# Altium PCB GATEWAY_PCB.PcbDoc (part 2 of 2)
Units mm, origin at the board's own origin, x right, y up, seen from the top; angles counter-clockwise.
Board outline 96.14 x 95.25 mm, 2 copper layers (Top Layer, Bottom Layer); 203 components, 123 nets, 653 pads, 432 vias.
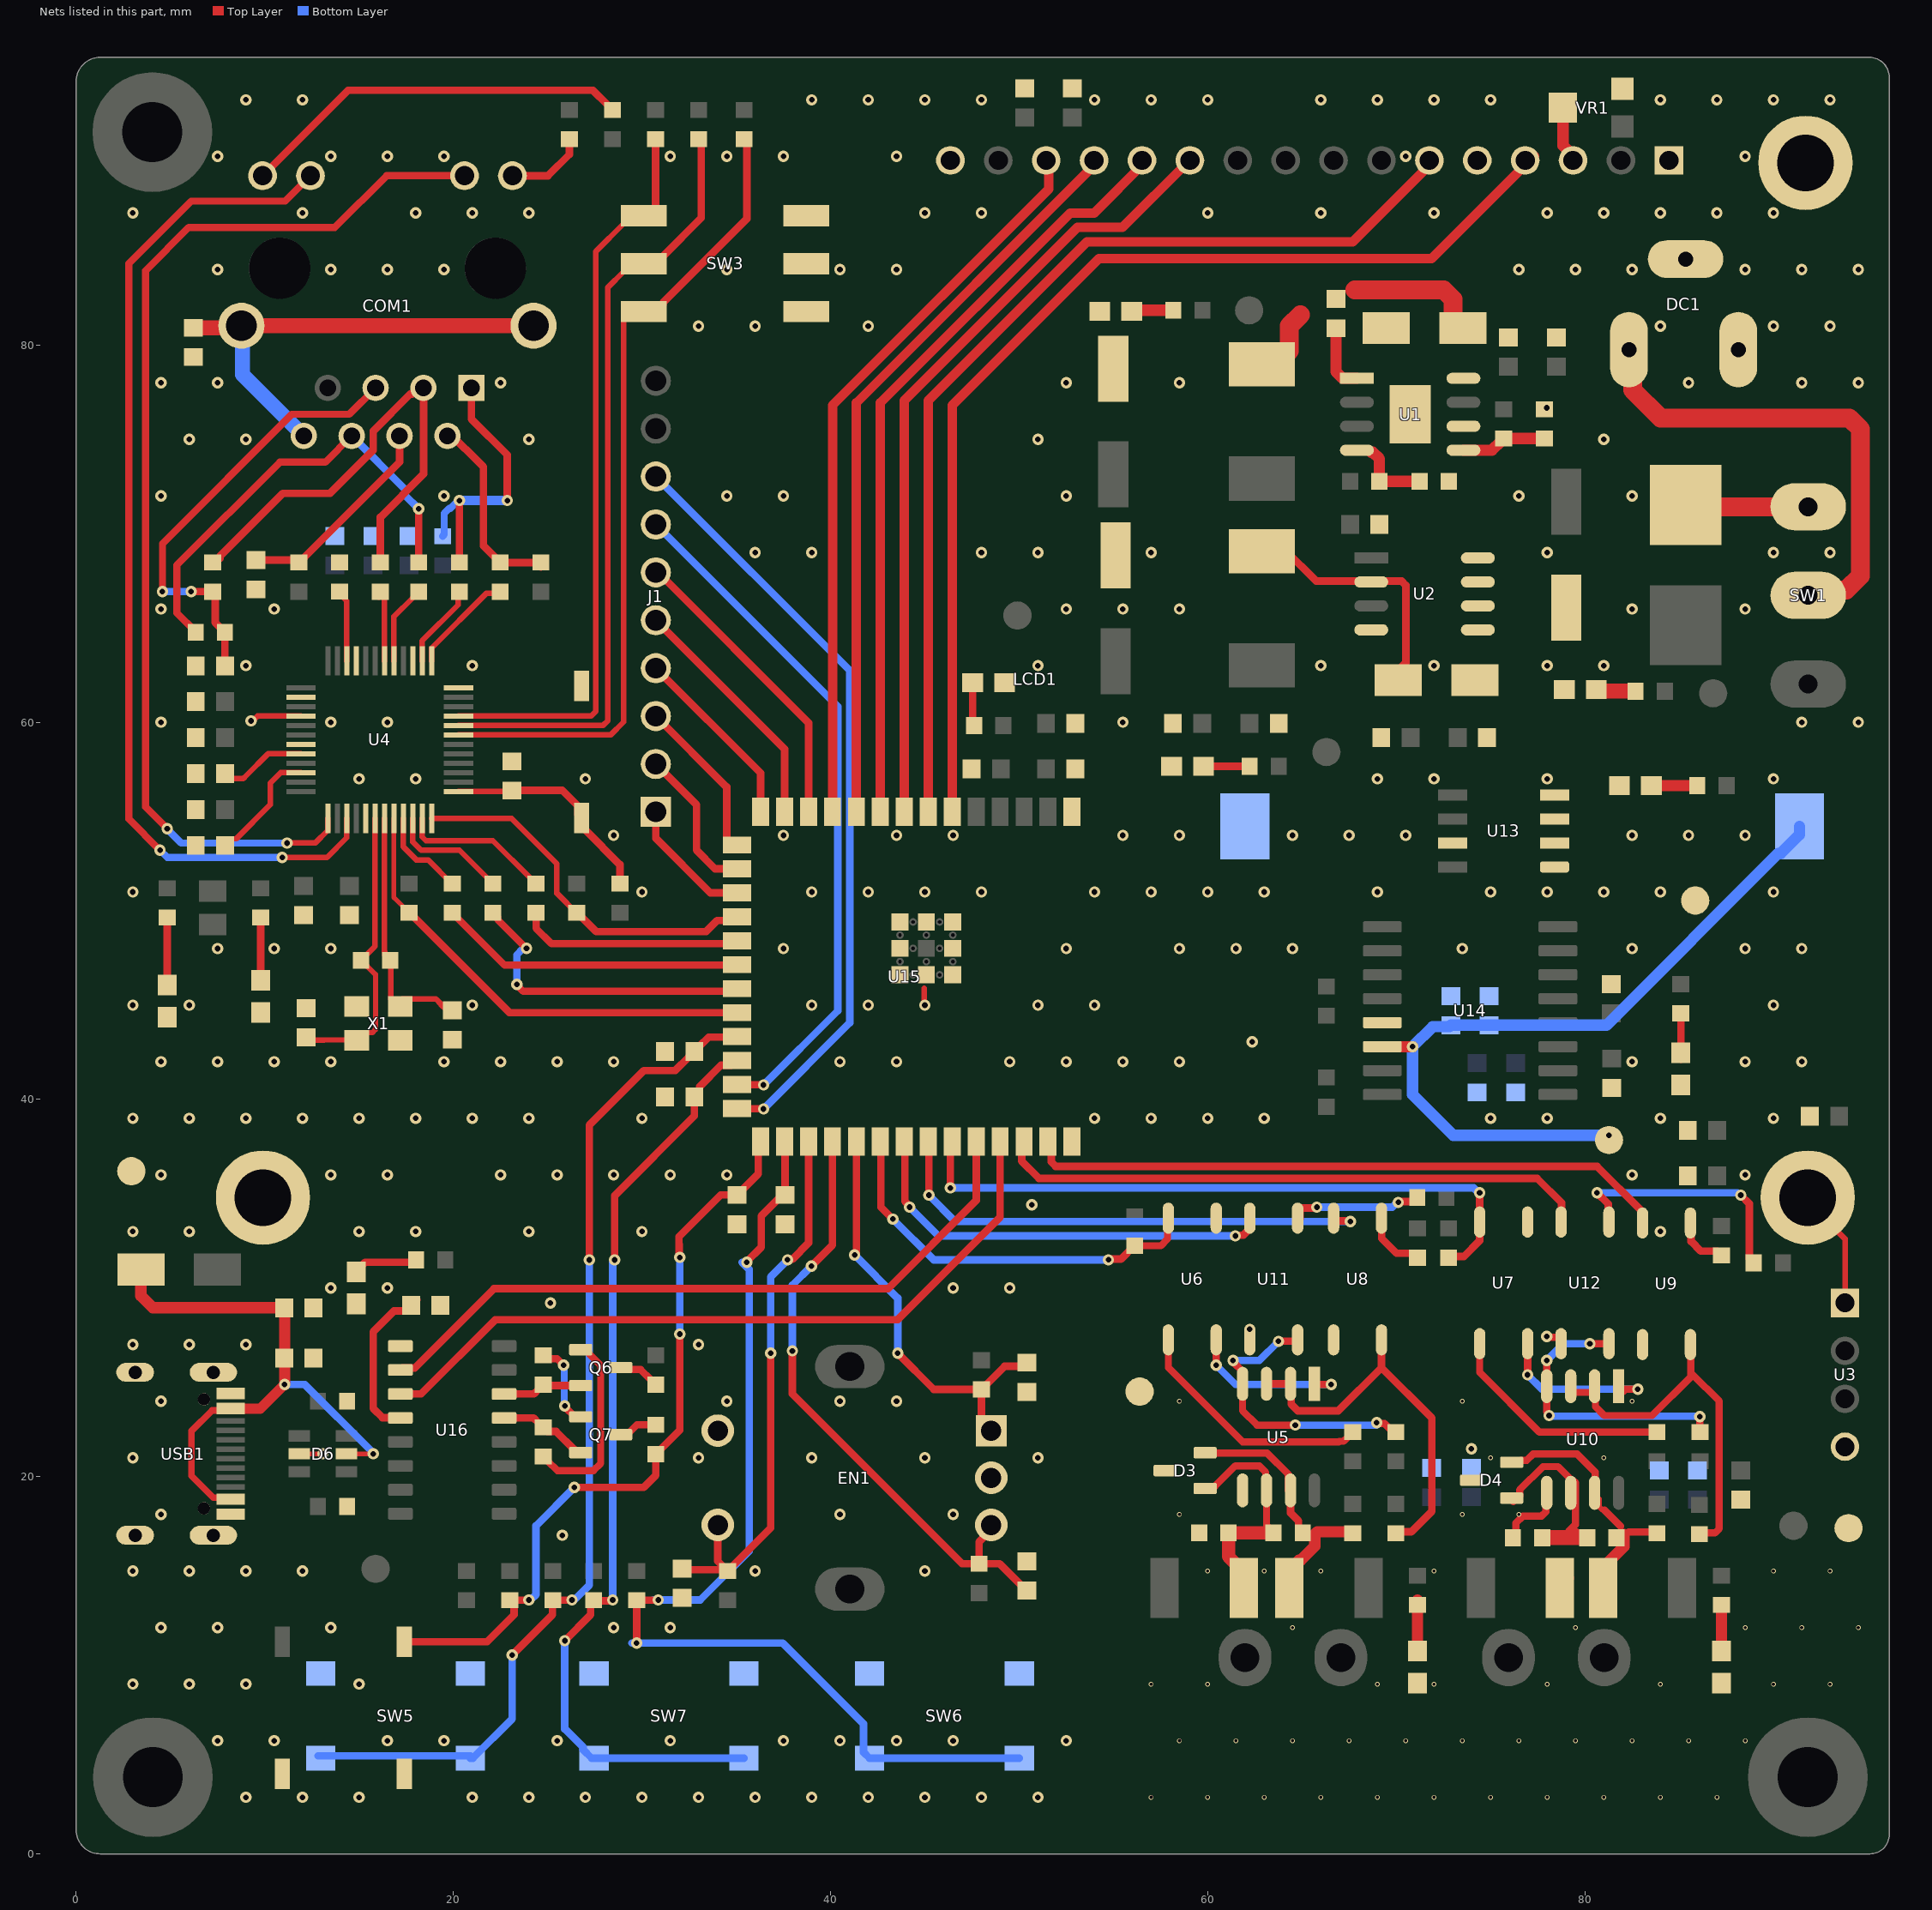
[diagram p2: the nets of this part, all layers, seen from the top]

## Via types
v1: diameter 0.6/0.6 (per signal layer), hole 0.3, Top Layer to Bottom Layer, 276 vias
v2: diameter 0.6, hole 0.3, Top Layer to Bottom Layer, tented both sides, 94 vias
v3: diameter 0.254/0.254 (per signal layer), hole 0.17, Top Layer to Bottom Layer, 49 vias
v4: diameter 0.6, hole 0.3, Top Layer to Bottom Layer, 13 vias

## Nets (pads, with @x,y where several pads share a name; then routed paths per layer and width w, separated by ;. In a path a pad name is that pad's centre, name@x,y a point inside that pad or via, vN(x,y) a via of type N, cw(c..) or ccw(c..) an arc to the next point about the centre after c; other vN are vias at no path point) (continued)
DEBUG_FLASH: C58.2 R80.1 R81.2 SW9.2 U15.27 | length 39.6
  Top Layer w0.4: SW9.2@17.399,11.245 21.786,11.245 23.217,12.676 R81.2@23.217,13.298 ; R81.2@22.993,13.456 R81.2@23.247,13.456 ; R81.2@23.09,13.298 R81.2@23.247,13.456 ; v2(24.003,13.462) 23.997,13.456 R81.2@23.247,13.456 ; v2(26.416,19.431) 30.096,19.431 30.731,20.066 R80.1@30.731,21.193 ; R80.1@30.734,21.196 30.759,21.196 30.984,21.421 30.984,21.446 32.004,22.466 v2(32.004,27.559) ; v2(32.004,31.623) 31.966,31.661 31.966,32.318 31.961,32.323 31.961,32.723 34.176,34.938 C58.2@35.052,34.938 36.171,36.057 U15.27@36.171,37.056
  Bottom Layer w0.4: v2@24.098,13.462 24.384,13.748 24.384,17.399 v2(26.416,19.431) ; v2(32.004,27.559) v2(32.004,31.623)
DEBUG_RXD0: U15.37 U16.3 | length 39.7
  Top Layer w0.4: U16.3@17.189,24.384 18.288,24.384 22.225,28.321 43.561,28.321 48.992,33.752 U15.37@48.992,37.759
DEBUG_TXD0: U15.36 U16.2 | length 37.4
  Top Layer w0.4: U16.2@17.189,25.654 17.299,25.764 17.949,25.764 22.157,29.972 43.053,29.972 47.722,34.641 U15.36@47.722,37.759
DI1: R46.1 U5.4 U11.4 | length 15.3
  Top Layer w0.381: v2(61.341,26.162) 61.383,26.12 61.383,26.048 61.849,25.582 U5.4@61.849,24.923 61.849,23.495 62.611,22.733 v4(64.643,22.733) ; v2(63.754,27.178) 64.693,27.178 U11.4@64.77,27.255 ; v4(68.961,22.86) 69.003,22.818 69.372,22.818 69.825,22.365 R46.1@69.85,22.365
  Bottom Layer w0.381: v2@61.348,26.169 62.745,26.169 v2(63.754,27.178) ; v4(64.643,22.733) 64.664,22.733 64.674,22.743 64.684,22.733 v4@68.961,22.733
DI2: R48.1 U10.4 U12.4 | length 15.6
  Top Layer w0.381: v4(77.978,26.162) U10.4@77.978,24.796 77.978,23.427 78.105,23.3 v4(78.105,23.241) ; v4(80.264,27.051) U12.4@81.28,27.051 ; R48.1@86.106,22.365 R48.1@86.106,22.44
  Top Layer w0.4: v4(86.094,23.181) 86.1,23.176 86.1,22.371 R48.1@86.106,22.365
  Bottom Layer w0.381: v4(77.978,26.162) 78.867,27.051 v4(80.264,27.051) ; v4(78.105,23.241) 78.135,23.211 86.065,23.211 v4(86.094,23.181)
DTR: Q7.2 R76.1 U16.13 | length 4.5
  Top Layer w0.4: U16.13@22.689,23.114 24.253,23.114 24.515,22.852 24.515,22.844 R76.1@24.711,22.648 ; R76.1@24.765,22.619 24.99,22.394 25.446,22.394 26.438,21.402 Q7.2@26.499,21.402
EN1: R41.1 U5.2 U5.3 U8.4 | length 20.8
  Top Layer w0.4: U5.3@63.119,24.923 U5.2@64.389,24.923 64.427,24.885 64.427,23.838 64.77,23.495 66.929,23.495 69.215,25.781 ; U8.4@69.215,27.255 69.215,25.781 ; R41.1@69.977,17.005 70.044,17.072 70.793,17.072 71.882,18.161 71.882,23.114 69.215,25.781
EN1_RS485: U8.2 U15.34 | length 26.7
  Top Layer w0.4: v2(45.212,34.925) U15.34@45.212,37.759 ; U8.2@66.684,33.622 66.74,33.566 67.526,33.566 v2(67.564,33.528)
  Bottom Layer w0.4: v2(45.212,34.925) 46.609,33.528 v2(67.564,33.528)
EN2: R43.1 U9.4 U10.2 U10.3 | length 19.5
  Top Layer w0.381: U10.3@79.502,24.465 80.518,24.465 80.56,24.423 80.56,23.707 81.026,23.241 83.566,23.241 85.618,25.293 85.618,25.507 ; U9.4@85.618,26.981 85.618,25.507 ; R43.1@86.16,17.018 86.899,17.018 87.122,17.241 87.122,24.003 85.725,25.4 85.618,25.507
EN2_RS485: U9.2 U15.39 | length 34.2
  Top Layer w0.4: U15.39@51.532,37.759 51.705,37.586 51.705,36.683 51.939,36.449 80.645,36.449 82.958,34.136 82.958,34.13 83.058,34.03 U9.2@83.058,33.451
ENC_CLK: C47.2 EN1.A R69.1 U15.31 | length 22.9
  Top Layer w0.4: v2(41.275,31.75) 41.275,31.804 41.372,31.901 U15.31@41.372,37.759 ; v2(43.561,26.543) 45.479,24.625 R69.1@48.006,24.625 ; EN1.A@48.521,22.439 48.006,22.954 R69.1@48.006,24.625 ; C47.2@50.419,26.048 50.218,25.847 49.228,25.847 48.256,24.875 48.256,24.85 48.031,24.625 R69.1@48.006,24.625
  Bottom Layer w0.4: v2(41.275,31.75) 43.561,29.464 v2(43.561,26.543)
ENC_DATA: C48.2 EN1.B R70.1 U15.30 | length 33.3
  Top Layer w0.4: v2(37.973,26.67) 37.973,24.384 46.977,15.38 R70.1@47.879,15.38 ; v2(38.984,31.164) 40.102,32.282 U15.30@40.102,37.759 ; EN1.B@48.521,17.439 48.521,17.183 47.879,16.541 R70.1@47.879,15.38 ; C48.2@50.419,13.957 50.394,13.957 48.971,15.38 R70.1@47.879,15.38
  Bottom Layer w0.4: v2(37.973,26.67) 37.973,30.153 v2(38.984,31.164)
ENC_SW: C46.2 EN1.E R68.1 U15.29 | length 29.6
  Top Layer w0.4: C46.2@32.131,15.126 32.194,15.062 34.294,15.062 R68.1@34.37,15.138 ; EN1.E@34.021,17.439 34.021,15.522 34.294,15.249 34.294,15.224 34.355,15.163 34.38,15.163 R68.1@34.544,14.999 34.569,14.999 34.794,15.224 34.794,15.249 36.83,17.285 v2(36.83,26.543) ; v2(37.719,31.496) 37.757,31.534 37.98,31.534 38.832,32.387 U15.29@38.832,37.759
  Bottom Layer w0.4: v2(36.83,26.543) 36.83,30.597 37.719,31.486 v2(37.719,31.496)
GND: C1.2 C2.2 C3.2 C4.2 C6.2 C7.2 C8.2 C10.2 C11.2 C12.2 C13.2 C15.1 C16.1 C17.1 C18.1 C19.1 C20.1 C21.1 C22.1 C23.1 C24.1 C25.1 C26.1 C27.1 C28.1 C29.1 C30.1 C35.1 C36.1 C37.1 C38.1 C39.1 C40.1 C42.1 C43.1 C44.1 C45.1 C46.1 C47.1 C48.1 C49.1 C50.1 C51.1 C52.1 C53.1 C54.1 C55.1 C56.1 C57.1 C58.1 D1.1 D2.1 D6.2 DC1.2 DC1.3 EN1.C EN1.D LCD1.1 LCD1.5 LCD1.16 LED1.2 LED2.2 LED3.2 LED4.2 LED5.2 LED12.2 LED13.2 LED14.2 LED15.2 R6.2 R7.2 R15.1 R82.2 R83.2 SW2.1 SW3.1_1 SW3.2_1 SW3.3_1 SW5.1 SW6.1 SW7.1 SW8.1 SW9.1 TP1.1 TP2.1 U1.6 U1.9 U2.4 U2.5 U2.6 U2.7 U2.8 U3.1 U4.3 U4.9 U4.14 U4.16 U4.19 U4.29 U4.48 U6.3 U7.3 U13.1 U13.2 U13.3 U13.4 U13.7 U14.13 U15.1 U15.40 U15.41_1 U15.41_2 U15.41_3 U15.41_4 U15.41_6 U15.41_7 U15.41_8 U15.41_9 U16.1 USB1.A1 USB1.B1 USB1.SHIELD VBAT1.N VR1.3 X1.2 X1.4 | length 13.4
  Top Layer w0.25: D6.2@11.831,21.209 v2(13.081,21.209)
  Top Layer w0.295: v2(9.271,60.071) 9.354,60.071 9.606,60.323 U4.16@11.916,60.323 ; LCD1.1@10.033,34.671 11.816,34.671 LCD1.1@11.943,34.544 ; 44.961,45.906 44.961,45.039 v1(45,45) ; R6.2@77.978,76.594 v2(77.978,76.669) ; LCD1.1@91.821,34.798 91.821,34.583 93.794,32.61 U3.1@93.794,29.21
  other v1: 9,3 12,3 15,3 21,3 24,3 27,3 30,3 33,3 36,3 39,3 42,3 45,3 48,3 51,3 7.5,6 10.5,6 16.5,6 19.5,6 25.5,6 31.5,6 37.5,6 40.5,6 43.5,6 46.5,6 52.5,6 3,9 6,9 9,9 15,9 4.5,12 7.5,12 13.5,12 28.5,12 31.5,12 3,15 6,15 9,15 12,15 36,15 45,15 4.5,18 40.5,18 46.5,18 3,21 33,21 39,21 45,21 51,21 4.5,24 34.5,24 40.5,24 43.5,24 3,27 6,27 9,27 33,27 13.5,30 16.5,30 46.5,30 49.5,30 3,33 6,33 15,33 18,33 24,33 30,33 84,33 4.5,36 13.5,36 16.5,36 22.5,36 25.5,36 28.5,36 31.5,36 34.5,36 82.5,36 88.5,36 3,39 6,39 9,39 12,39 15,39 18,39 21,39 24,39 30,39 54,39 57,39 60,39 63,39 75,39 78,39 84,39 90,39 4.5,42 7.5,42 10.5,42 13.5,42 19.5,42 22.5,42 25.5,42 28.5,42 40.5,42 43.5,42 49.5,42 52.5,42 55.5,42 58.5,42 82.5,42 88.5,42 91.5,42 3,45 6,45 21,45 39,45 42,45 51,45 54,45 90,45 7.5,48 10.5,48 13.5,48 37.5,48 52.5,48 58.5,48 61.5,48 64.5,48 73.5,48 82.5,48 88.5,48 91.5,48 3,51 30,51 39,51 42,51 45,51 48,51 54,51 57,51 60,51 63,51 69,51 75,51 78,51 81,51 84,51 90,51 28.5,54 37.5,54 43.5,54 46.5,54 55.5,54 58.5,54 64.5,54 67.5,54 70.5,54 82.5,54 85.5,54 88.5,54 15,57 18,57 27,57 69,57 72,57 78,57 90,57 4.5,60 13.5,60 16.5,60 55.5,60 91.5,60 94.5,60 9,63 21,63 51,63 66,63 72,63 78,63 81,63 4.5,66 10.5,66 52.5,66 55.5,66 58.5,66 82.5,66 88.5,66 36,69 39,69 48,69 51,69 57,69 78,69 90,69 93,69 4.5,72 19.5,72 34.5,72 37.5,72 52.5,72 76.5,72 82.5,72 6,75 9,75 24,75 51,75 81,75 4.5,78 7.5,78 22.5,78 52.5,78 58.5,78 85.5,78 91.5,78 94.5,78 33,81 36,81 42,81 84,81 90,81 93,81 7.5,84 13.5,84 16.5,84 19.5,84 34.5,84 40.5,84 43.5,84 76.5,84 79.5,84 82.5,84 88.5,84 91.5,84 94.5,84 3,87 12,87 18,87 21,87 24,87 45,87 48,87 60,87 66,87 72,87 78,87 81,87 84,87 87,87 90,87 7.5,90 13.5,90 16.5,90 19.5,90 31.5,90 34.5,90 37.5,90 43.5,90 70.5,90 88.5,90 9,93 12,93 39,93 42,93 45,93 48,93 54,93 57,93 60,93 66,93 69,93 72,93 75,93 84,93 87,93 90,93 93,93
  other v2: 25.781,16.891 25.146,29.21 50.673,34.417
  other v4: 62.357,43.053
GND_RJ45: C15.2 COM1.8 COM1.15 COM1.16 | length 25.7
  Top Layer w0.8: C15.2@6.604,80.912 8.648,80.912 COM1.16@8.76,81.024 ; COM1.16@8.56,81.073 8.609,81.024 COM1.15@24.255,81.024
  Bottom Layer w0.6: COM1.16@8.76,81.024 COM1.16@8.76,81.078 ; COM1.15@24.132,81.278 COM1.15@24.255,81.155 ; COM1.15@24.255,81.278 COM1.15@24.255,81.155 ; COM1.15@24.257,81.153 COM1.15@24.255,81.155
  Bottom Layer w0.8: COM1.16@8.662,81.175 8.76,81.078 8.809,81.028 8.809,78.44 COM1.8@12.065,75.184
GND_RS485: C14.2 C31.2 C32.2 C33.2 C34.2 D3.3 D4.3 LED10.2 LED11.2 R39.1 R50.1 TP3.1 TP10.1 U3.4 U5.5 U8.3 U9.3 U10.5 U11.3 U12.3 | length 5.5
  Top Layer w0.381: U11.3@62.23,27.255 v4(62.23,27.813) ; R50.1@76.06,16.764 76.077,16.764 76.337,17.024 76.337,17.536 76.708,17.907 77.7,17.907 77.936,18.143 77.936,19.104 U10.5@77.978,19.146 ; v4(77.978,27.432) 78.02,27.39 78.639,27.39 78.74,27.289 U12.3@78.74,27.051 U12.3@78.689,27
  other v2: 73.986,21.475
  other v3: 57,3 60,3 63,3 66,3 69,3 72,3 75,3 78,3 81,3 84,3 87,3 58.5,6 61.5,6 64.5,6 67.5,6 70.5,6 73.5,6 76.5,6 79.5,6 82.5,6 85.5,6 88.5,6 57,9 60,9 69,9 72,9 78,9 84,9 90,9 93,9 64.5,12 79.5,12 88.5,12 91.5,12 94.5,12 60,15 63,15 66,15 72,15 90,15 93,15 58.5,18 73.5,18 76.5,18 75,21 81,21 58.5,24 73.5,24 82.5,24
IO3: J1.3 U15.15 | length 8.8
  Top Layer w0.4: J1.3@30.734,60.325 34.492,56.567 34.492,53.744 34.742,53.494 U15.15@35.042,53.494
IO8: J1.6 U15.12 | length 16.1
  Top Layer w0.4: J1.6@30.734,67.945 30.861,67.945 38.832,59.974 U15.12@38.832,55.259
IO9: J1.1 U15.17 | length 6.9
  Top Layer w0.4: J1.1@30.734,55.245 30.734,53.848 33.628,50.954 U15.17@35.042,50.954
IO19: J1.5 U15.13 | length 13
  Top Layer w0.4: J1.5@30.734,65.405 37.562,58.577 U15.13@37.562,55.259
IO20: J1.4 U15.14 | length 9.9
  Top Layer w0.4: J1.4@30.734,62.865 36.292,57.307 U15.14@36.292,55.259
IO45: J1.8 U15.26 | length 41.1
  Top Layer w0.4: U15.26@35.042,39.524 35.056,39.511 36.435,39.511 v4(36.449,39.497)
  Bottom Layer w0.4: J1.8@30.734,73.025 41.021,62.738 41.021,44.069 36.456,39.504 36.442,39.504 v4(36.449,39.497)
IO46: J1.2 U15.16 | length 8
  Top Layer w0.4: J1.2@30.734,57.785 32.893,55.626 32.893,53.213 33.882,52.224 U15.16@35.042,52.224
IO48: J1.7 U15.25 | length 37
  Top Layer w0.4: U15.25@35.179,40.894 35.142,40.894 U15.25@35.042,40.794 35.056,40.781 36.435,40.781 v4(36.449,40.767)
  Bottom Layer w0.4: J1.7@30.734,70.485 40.386,60.833 40.386,44.704 36.456,40.774 36.442,40.774 v4(36.449,40.767)
LED1: COM1.11 U4.27 | length 54.9
  Top Layer w0.295: v2(10.922,52.832) 13.302,52.832 14.346,53.876 U4.27@14.346,54.893
  Top Layer w0.38: v2(4.445,53.213) 2.794,54.864 2.794,84.328 6.096,87.63 11.081,87.63 COM1.11@12.425,88.974
  Bottom Layer w0.254: COM1.11@12.425,89.228 12.425,89.26 COM1.11@12.446,89.281
  Bottom Layer w0.38: v2(4.445,53.213) 4.826,52.832 v2(10.922,52.832)
LED2: COM1.10 U4.25 | length 58.8
  Top Layer w0.295: v2(11.176,53.594) 12.671,53.594 13.346,54.268 U4.25@13.346,54.893
  Top Layer w0.38: v2(4.826,54.356) 3.683,55.499 3.683,83.947 5.969,86.233 13.716,86.233 16.457,88.974 COM1.10@20.59,88.974 COM1.10@20.595,88.974
  Bottom Layer w0.38: v2(4.826,54.356) 4.826,54.331 5.563,53.594 v2(11.176,53.594)
NetC5_1: C5.1 U1.1 | length 3.6
  Top Layer w0.6: C5.1@66.802,80.902 66.802,78.583 67.153,78.232 U1.1@67.914,78.232
NetC5_2: C5.2 D2.2 L1.1 U1.8 | length 10.6
  Top Layer w1: L1.1@63.271,79.022 63.653,79.022 64.328,79.697 64.328,81.012 64.913,81.598 ; 67.795,82.932 72.501,82.932 73.018,82.415 73.018,81.249 73.368,80.899 D2.2@73.407,80.899
NetC24_2: C24.2 U4.22 | length 6.3
  Top Layer w0.295: C24.2@7.887,53.467 7.887,53.492 8.214,53.82 8.481,53.82 10.287,55.626 10.287,56.769 10.841,57.323 U4.22@11.916,57.323
NetC25_2: C25.2 U4.20 | length 4.5
  Top Layer w0.295: C25.2@7.919,57.023 8.868,57.023 9.017,57.172 10.169,58.323 U4.20@11.916,58.323
NetC26_2: C26.2 COM1.5 R20.1 R21.1 | length 24.2
  Top Layer w0.38: v2(4.572,66.929) 4.572,69.469 11.43,76.327 14.478,76.327 COM1.5@15.875,77.724
  Top Layer w0.4: v2(6.096,66.929) 6.102,66.923 7.233,66.923 R21.1@7.239,66.916 ; R21.1@7.366,66.916 7.366,65.291 7.637,65.02 7.662,65.02 7.887,64.795 C26.2@7.887,62.992
  Bottom Layer w0.381: v2(4.572,66.929) v2@6.223,66.929
NetC27_2: C27.2 COM1.4 R19.2 | length 11.1
  Top Layer w0.4: C27.2@9.525,68.593 11.684,68.593 R19.2@11.811,68.466 ; R19.2@12.094,68.736 17.15,73.792 COM1.4@17.15,75.438
NetC44_2: C44.2 R65.1 SW5.2 U15.23 | length 55.2
  Top Layer w0.4: v2(23.114,10.541) 25.249,12.676 25.249,13.298 R65.1@25.4,13.449 ; R65.1@25.254,13.456 26.283,13.456 v2(26.289,13.462) ; v2(27.205,31.491) 27.205,38.635 30.099,41.529 31.763,41.529 32.479,42.245 32.504,42.245 32.779,42.52 32.779,42.57 33.054,42.845 33.079,42.845 33.541,43.307 U15.23@35.428,43.307
  Bottom Layer w0.4: SW5.2@12.831,5.199 20.906,5.199 SW5.2@20.906,5.072 21.031,5.072 23.114,7.155 v2(23.114,10.541) ; v2@26.416,13.462 27.205,14.251 v2(27.205,31.491)
NetC45_2: C45.2 R66.1 SW6.2 U15.28 | length 55.7
  Top Layer w0.4: v2(29.718,11.176) R66.1@29.718,13.449 29.724,13.456 30.855,13.456 v2(30.861,13.462) ; v2(35.56,31.369) 35.56,31.401 36.322,32.163 36.322,33.82 37.389,34.887 C45.2@37.579,35.077 ; C45.2@37.592,34.938 U15.28@37.592,37.098
  Bottom Layer w0.4: v2@29.464,11.176 37.465,11.176 41.752,6.889 41.752,5.385 SW6.2@42.065,5.072 SW6.2@50.015,5.072 ; v2@30.607,13.462 33.089,13.462 35.687,16.06 35.687,30.988 v2@35.306,31.369
NetC49_2: C49.2 R72.2 SW7.2 U15.24 | length 50.7
  Top Layer w0.4: v2(25.908,11.303) 27.281,12.676 27.281,13.298 R72.2@27.432,13.449 27.445,13.462 R72.2@27.775,13.462 ; R72.2@27.775,13.424 28.41,13.424 v2(28.448,13.462) ; v2(28.548,31.491) 28.548,34.898 32.779,39.129 C49.2@32.779,40.157 ; C49.2@32.779,40.132 33.054,40.407 33.054,40.674 34.194,41.814 34.738,41.814 U15.24@35.215,42.291
  Bottom Layer w0.4: v2(25.908,11.303) 25.908,6.624 26.885,5.647 26.885,5.522 27.335,5.072 SW7.2@27.46,5.072 SW7.2@35.41,5.072 ; v2(28.448,13.462) 28.448,31.337 28.548,31.437 v2(28.548,31.491)
NetC57_2: C57.2 U16.4 | length 8.9
  Top Layer w0.4: U16.4@17.189,23.114 17.171,23.132 16.238,23.132 15.748,23.622 15.748,27.686 16.845,28.783 17.746,28.783 18.021,29.058 C57.2@18.021,29.083 ; C57.2@17.865,29.206 18.042,29.383 C57.2@18.067,29.383
NetCOM1_1: COM1.1 R17.1 R24.2 | length 14.9
  Top Layer w0.38: R24.2@20.32,68.466 v2(20.32,71.755)
  Top Layer w0.4: COM1.1@20.96,77.724 20.96,76.068 22.86,74.168 v2(22.86,71.755)
  Bottom Layer w0.38: R17.1@19.431,69.863 19.514,69.946 19.514,71.076 19.783,71.345 19.85,71.345 20.26,71.755 v2(20.32,71.755)
  Bottom Layer w0.5: v2(20.32,71.755) v2(22.86,71.755)
NetCOM1_2: COM1.2 R16.1 R23.2 | length 10.2
  Top Layer w0.4: COM1.2@19.69,75.438 21.59,73.538 21.59,69.355 R23.2@22.479,68.466 R16.1@24.384,68.466 ; R16.1@24.638,68.225 R16.1@24.759,68.345
NetCOM1_3: COM1.3 R21.2 R22.2 | length 25.5
  Top Layer w0.4: R21.2@7.366,68.541 7.466,68.541 7.616,68.691 7.616,68.791 10.961,72.136 13.462,72.136 15.748,74.422 15.748,75.438 17.706,77.396 17.817,77.396 17.954,77.533 18.415,77.533 18.415,73.152 16.129,70.866 R22.2@16.129,68.359
NetCOM1_6: COM1.6 R18.2 R20.2 | length 24.2
  Top Layer w0.38: R20.2@6.337,64.77 6.337,64.795 5.334,65.798 5.334,68.326 10.795,73.787 13.208,73.787 COM1.6@14.605,75.184
  Top Layer w0.4: v2(18.158,71.312) 18.158,68.605 R18.2@18.209,68.555
  Bottom Layer w0.4: COM1.6@14.605,75.184 17.447,72.342 17.447,72.023 v2(18.158,71.312)
NetCOM1_9: COM1.9 R25.2 | length 4.3
  Top Layer w0.4: COM1.9@23.13,88.974 25.015,88.974 26.15,90.109 R25.2@26.15,90.907
NetCOM1_12: COM1.12 R32.2 | length 21.4
  Top Layer w0.4: COM1.12@9.88,88.974 9.705,88.974 9.652,89.027 9.938,89.027 14.421,93.51 27.396,93.51 28.186,92.719 28.186,92.682 28.411,92.457 R32.2@28.448,92.457
NetD1_2: D1.2 L2.1 U2.2 | length 12.4
  Top Layer w0.4: L2.1@63.525,69.139 64.1,69.139 65.751,67.488 67.884,67.488 67.896,67.475 68.663,67.475 68.676,67.488 68.689,67.475 69.456,67.475 69.468,67.488 70.276,67.488 70.51,67.253 70.51,63.17 D1.2@70.129,62.789
NetD3_1: D3.1 F2.1 R38.1 R39.2 U5.6 | length 12.8
  Top Layer w0.381: D3.1@59.861,19.37 59.97,19.479 60.373,19.479 61.468,20.574 62.738,20.574 63.077,20.235 U5.6@63.077,19.332 ; U5.6@63.119,19.273 63.119,17.411 63.487,17.043 R38.1@63.487,17.018
  Top Layer w0.7: F2.1@61.917,14.097 61.917,14.947 61.1,15.764 R39.2@61.1,17.018 61.175,17.018 61.227,17.018 R38.1@63.487,17.018
NetD3_2: D3.2 F1.1 R33.1 R38.2 U5.7 | length 13.8
  Top Layer w0.258: R38.2@65.058,17.018 65.121,16.955 65.683,16.955
  Top Layer w0.381: D3.2@59.882,21.249 63.15,21.249 64.271,20.128 U5.7@64.271,19.273
  Top Layer w0.4: U5.7@64.389,19.273 64.389,18.084 64.812,17.661 64.812,17.243 R38.2@65.037,17.018
  Top Layer w0.6: F1.1@64.389,14.268 64.389,15.118 64.839,15.568 64.936,15.568 65.683,16.315 65.683,16.955 65.808,17.08 ; 65.942,17.074 67.44,17.074 R33.1@67.446,17.067
NetD4_1: D4.1 F4.1 R49.1 R50.2 U10.6 | length 11.2
  Top Layer w0.381: D4.1@76.2,18.673 76.2,18.958 76.528,18.958 76.542,18.971 76.542,19.3 77.778,20.536 78.578,20.536 79.326,19.788 79.401,19.788 79.502,19.687 79.502,19.146 79.502,17.461 79.134,17.093 79.134,17.068 79.579,17.068 R49.1@79.756,16.891
  Top Layer w0.7: F4.1@78.681,14.224 F4.1@79.081,14.624
  Top Layer w0.8: R50.2@77.737,16.764 79.579,16.764 R49.1@80.124,16.764
NetD4_2: D4.2 F3.1 R44.1 R49.2 U10.7 | length 13.3
  Top Layer w0.258: U10.7@80.772,18.815 80.772,18.385 80.93,18.227 81.036,18.227 ; 81.887,17.376 81.887,17.085 81.891,17.081 82.182,17.081 82.182,16.764
  Top Layer w0.381: D4.2@76.498,20.762 76.607,20.872 76.923,20.872 77.257,21.206 79.586,21.206 80.547,20.245 U10.7@80.547,19.04 ; 82.322,17.068 R44.1@83.807,17.068
  Top Layer w0.4: 81.036,18.227 81.887,17.376
  Top Layer w0.6: F3.1@80.899,14.274 80.899,15.124 81.349,15.574 82.07,16.295 R49.2@82.07,16.943
NetFuse1_1: Fuse1.1 SW1.1 | length 6.4
  Top Layer w1: Fuse1.1@85.496,71.564 85.636,71.425 SW1.1@91.846,71.425
NetLCD1_4: LCD1.4 U15.6 | length 58.3
  Top Layer w0.5: U15.6@46.331,55.259 46.331,55.138 U15.6@46.452,55.259 46.452,76.805 54.229,84.582 71.882,84.582 76.835,89.535 LCD1.4@76.835,89.789 ; LCD1.4@76.962,89.662 LCD1.4@77.326,90.026
NetLCD1_6: LCD1.6 U15.7 | length 54.1
  Top Layer w0.5: U15.7@45.061,55.259 45.061,55.388 U15.7@45.182,55.509 ; U15.7@45.182,55.259 U15.7@45.182,55.509 ; LCD1.6@71.755,89.789 71.755,89.535 67.691,85.471 53.594,85.471 45.182,77.059 U15.7@45.182,55.509
NetLCD1_11: LCD1.11 U15.8 | length 42.3
  Top Layer w0.5: U15.8@43.912,55.259 43.912,77.059 53.086,86.233 55.477,86.233 58.906,89.662 LCD1.11@59.182,89.662
NetLCD1_12: LCD1.12 U15.9 | length 41.2
  Top Layer w0.5: U15.9@42.521,55.259 42.521,55.138 U15.9@42.642,55.259 42.642,76.932 52.705,86.995 53.975,86.995 LCD1.12@56.642,89.662
NetLCD1_13: LCD1.13 U15.10 | length 39.8
  Top Layer w0.5: U15.10@41.372,55.259 41.372,76.932 53.975,89.535 LCD1.13@53.975,89.789
NetLCD1_14: LCD1.14 U15.11 | length 39.4
  Top Layer w0.5: U15.11@39.981,55.259 39.981,55.138 U15.11@40.102,55.259 40.102,76.805 51.562,88.265 LCD1.14@51.562,89.662
NetLED1_1: LED1.1 R1.2 | length 2
  Top Layer w0.8: LED1.1@80.666,61.646 R1.2@82.689,61.646
NetLED2_1: LED2.1 R2.2 | length 1.8
  Top Layer w0.6: LED2.1@56.249,81.837 56.251,81.839 R2.2@58.051,81.839
NetLED3_1: LED3.1 R3.2 | length 2.3
  Top Layer w0.4: LED3.1@59.908,57.66 61.992,57.66 62.09,57.758 R3.2@62.09,57.785
NetLED4_1: LED4.1 R8.2 | length 3.6
  Top Layer w0.4: R8.2@4.826,49.644 4.826,46.065 LED4.1@4.827,46.064
NetLED5_1: LED5.1 R9.2 | length 3.3
  Top Layer w0.4: R9.2@9.779,49.644 9.779,46.319 LED5.1@9.78,46.318
NetLED10_1: LED10.1 R55.2 | length 2.4
  Top Layer w0.6: LED10.1@87.25,10.758 R55.2@87.25,13.195
NetLED11_1: LED11.1 R56.2 | length 2.4
  Top Layer w0.6: LED11.1@71.12,11.013 R56.2@71.12,13.449
NetLED12_1: LED12.1 R61.2 | length 2.3
  Top Layer w0.4: LED12.1@85.091,42.127 LED12.1@85.093,42.471 R61.2@85.091,44.451
NetLED13_1: LED13.1 R62.2 | length 1.9
  Top Layer w0.6: LED13.1@84.038,56.641 R62.2@85.966,56.642
NetLED14_1: LED14.1 R77.2 | length 2.3
  Top Layer w0.38: LED14.1@47.535,62.104 47.535,59.894 R77.2@47.612,59.817
NetLED15_1: LED15.1 R78.2 | length 3.4
  Top Layer w0.4: LED15.1@14.859,30.861 14.859,30.911 15.317,31.369 R78.2@18.021,31.369
NetQ6_1: Q6.1 R76.2 | length 10.2
  Top Layer w0.38: R76.2@24.765,21.069 24.79,21.069 25.025,20.834 25.025,20.809 25.514,20.32 27.432,20.32 27.813,20.701 27.813,25.908 27.178,26.543 27.178,26.621 27.068,26.731 Q6.1@26.753,26.731
NetQ6_3: Q6.3 R75.2 | length 2.2
  Top Layer w0.38: Q6.3@28.873,25.781 28.973,25.681 29.932,25.681 30.474,25.139 30.474,25.114 30.709,24.879 R75.2@30.734,24.879
NetQ7_1: Q7.1 R79.2 | length 4.5
  Top Layer w0.381: R79.2@24.892,26.429 24.892,26.382 25.025,26.25 25.507,26.25 v2(25.849,25.908) ; v2(25.908,23.749) 25.908,23.705 26.438,23.175 Q7.1@26.753,23.175
  Bottom Layer w0.381: v2(25.849,25.908) 25.878,25.878 25.878,23.779 v2(25.908,23.749)
NetQ7_3: Q7.3 R80.2 | length 2.2
  Top Layer w0.38: Q7.3@28.619,22.352 Q7.3@28.729,22.242 ; Q7.3@28.873,22.225 28.983,22.335 29.32,22.335 29.731,22.746 R80.2@30.734,22.746
NetR4_2: R4.2 R6.1 U1.5 | length 4.6
  Top Layer w0.6: U1.5@73.564,74.422 75.07,74.422 75.542,74.894 75.542,74.919 75.667,75.044 R4.2@75.692,75.044 R6.1@77.851,75.044
NetR5_2: R5.2 R7.1 U1.4 | length 4
  Top Layer w0.6: U1.4@68.676,74.32 68.75,74.32 69.101,73.969 R5.2@69.101,72.824 ; R5.2@69.101,72.771 R7.1@71.361,72.771
NetR10_1: R10.1 U4.32 U15.22 | length 25
  Top Layer w0.254: U4.32@16.846,54.893 16.846,50.705 17.33,50.221 17.33,50.196 17.628,49.898 R10.1@17.653,49.898 R10.1@17.653,49.823
  Top Layer w0.4: R10.1@17.653,49.823 17.753,49.823 22.972,44.604 U15.22@35.042,44.604
NetR11_1: R11.1 U4.36 U15.18 | length 19.9
  Top Layer w0.295: U4.36@18.846,54.893 23.085,54.893 25.487,52.491 25.487,50.929 26.593,49.823 R11.1@26.643,49.823
  Top Layer w0.4: R11.1@26.643,49.823 27.571,48.895 33.401,48.895 33.992,49.486 34.844,49.486 U15.18@35.042,49.684
NetR12_1: R12.1 U4.35 | length 8.2
  Top Layer w0.295: U4.35@18.346,54.893 18.346,53.917 18.542,53.721 22.098,53.721 24.081,51.738 24.081,51.725 24.454,51.353 R12.1@24.466,51.353
NetR12_2: R12.2 U15.19 | length 11.9
  Top Layer w0.38: R12.2@24.384,49.898 24.384,49.076 25.2,48.26 34.888,48.26 U15.19@35.042,48.414
NetR13_1: R13.1 U4.34 | length 6.7
  Top Layer w0.295: U4.34@17.846,54.893 17.846,53.655 18.288,53.213 20.32,53.213 21.795,51.738 21.795,51.725 22.294,51.227 R13.1@22.306,51.227
NetR13_2: R13.2 U15.21 | length 17.1
  Top Layer w0.38: R13.2@22.098,49.898 22.123,49.898 22.358,49.663 22.358,49.524 v2(23.876,48.006) ; v2(23.368,46.101) 23.368,46.063 23.701,45.731 U15.21@35.426,45.731
  Bottom Layer w0.38: v2(23.368,46.101) 23.368,47.673 23.659,47.964 23.834,47.964 v2(23.876,48.006)
NetR14_1: R14.1 U4.33 | length 4.8
  Top Layer w0.295: 17.346,53.393 U4.33@17.346,54.893 ; 17.398,53.341 18.034,52.705 18.657,52.705 19.914,51.448 R14.1@19.939,51.448
NetR14_2: R14.2 U15.20 | length 16.5
  Top Layer w0.38: R14.2@19.835,50.129 19.86,50.129 20.072,49.917 R14.2@20.072,49.892 ; R14.2@19.945,49.892 22.72,47.117 U15.20@34.974,47.117
NetR15_2: R15.2 U4.10 | length 3.5
  Top Layer w0.295: R15.2@14.097,66.675 14.346,66.426 U4.10@14.346,63.253
NetR35_1: R35.1 U6.1 | length 12.7
  Top Layer w0.381: U6.1@57.912,27.255 57.912,25.781 61.849,21.844 66.954,21.844 66.987,21.876 67.202,21.876 R35.1@67.437,22.111
NetR37_1: R37.1 U7.1 | length 11.7
  Top Layer w0.381: U7.1@74.422,26.543 74.422,25.527 77.584,22.365 R37.1@83.82,22.365
NetR40_1: R40.1 U8.1 | length 3.3
  Top Layer w0.381: U8.1@69.224,33.622 69.226,33.62 69.226,32.628 70.009,31.845 70.885,31.845 R40.1@71.12,31.61
NetR42_1: R42.1 U9.1 | length 2.8
  Top Layer w0.4: U9.1@85.584,33.338 85.636,33.286 85.636,32.474 86.148,31.962 87.024,31.962 R42.1@87.249,31.737
NetR45_1: R45.1 U11.1 | length 6.9
  Top Layer w0.4: U11.1@64.906,33.678 64.906,34.149 64.998,34.241 65.683,34.241 65.732,34.29 v2(65.786,34.29) ; v2(70.104,34.544) 70.142,34.582 70.891,34.582 R45.1@71.107,34.798
  Bottom Layer w0.4: v2(65.786,34.29) 69.796,34.29 70.05,34.544 v2(70.104,34.544)
NetR47_1: R47.1 U12.1 | length 13.4
  Top Layer w0.4: v2(80.645,35.052) 81.242,34.455 81.242,33.539 U12.1@81.28,33.501 ; v2(88.265,34.925) 88.725,34.465 88.725,31.564 R47.1@88.95,31.339
  Bottom Layer w0.4: v2(80.645,35.052) 88.084,35.052 88.211,34.925 v2(88.265,34.925)
PMODE0: R28.1 SW3.1 U4.45 | length 39.6
  Top Layer w0.295: U4.45@20.276,60.323 27.303,60.323 27.559,60.579 27.559,84.963 29.028,86.432 29.028,86.439 29.445,86.856 SW3.1@30.1,86.856
  Top Layer w0.4: SW3.1@30.1,86.856 30.357,86.856 30.722,87.221 R28.1@30.722,90.907
PMODE1: R27.1 SW3.2 U4.44 | length 41.7
  Top Layer w0.295: U4.44@20.276,59.823 27.929,59.823 28.194,60.088 28.194,83.058 29.028,83.892 29.028,83.899 29.445,84.316 SW3.2@30.1,84.316
  Top Layer w0.4: SW3.2@30.1,84.201 30.64,84.201 31.12,84.681 31.12,84.714 33.147,86.741 R27.1@33.147,90.907
PMODE2: R26.1 SW3.3 U4.43 | length 43.3
  Top Layer w0.295: U4.43@20.276,59.323 28.335,59.323 29.028,60.016 29.028,81.359 29.445,81.776 SW3.3@30.1,81.776
  Top Layer w0.4: SW3.3@30.1,81.776 30.755,81.776 31.12,82.141 31.12,82.245 35.56,86.684 R26.1@35.56,90.832
RESET: C30.2 R31.2 SW2.2 U4.37 | length 12.6
  Top Layer w0.295: U4.37@20.276,56.323 22.937,56.323 C30.2@23.127,56.133 ; C30.2@23.114,56.121 C30.2@23.381,56.388 ; SW2.2@26.797,54.922 27.05,54.67 SW2.2@27.05,54.23
  Top Layer w0.4: C30.2@23.381,56.388 25.781,56.388 26.597,55.572 26.597,55.122 SW2.2@26.797,54.922 26.997,54.722 26.997,54.283 28.829,52.451 R31.2@28.829,51.513
RO1: U5.1 U6.2 | length 8.8
  Top Layer w0.381: v2(60.452,25.908) U6.2@60.452,27.255 ; U5.1@65.659,24.923 65.69,24.892 v2(66.548,24.892)
  Bottom Layer w0.381: v2(60.452,25.908) 61.468,24.892 v2(66.548,24.892)
RO2: U7.2 U10.1 | length 8.6
  Top Layer w0.4: v2(76.962,25.4) U7.2@76.962,27.051 ; U10.1@82.042,24.542 82.138,24.638 v2(82.804,24.638)
  Bottom Layer w0.4: v2(76.962,25.4) 77.724,24.638 v2(82.804,24.638)
RTS: Q6.2 R79.1 U16.14 | length 4.3
  Top Layer w0.4: U16.14@22.689,24.384 24.27,24.384 24.515,24.629 24.515,24.654 24.74,24.879 R79.1@24.765,24.879 24.813,24.831 Q6.2@26.753,24.831
RX1_RS485: R34.1 U6.4 U15.32 | length 20.7
  Top Layer w0.381: R34.1@56.134,32.245 57.518,32.245 57.87,32.597 57.87,33.663 U6.4@57.912,33.705
  Top Layer w0.4: U15.32@42.672,37.049 42.672,34.29 v2(43.307,33.655) ; v2(54.737,31.496) 54.775,31.534 55.398,31.534 56.109,32.245 R34.1@56.134,32.245
  Bottom Layer w0.4: v2(43.307,33.655) 45.466,31.496 v2(54.737,31.496)
RX2_RS485: R36.1 U7.4 U15.35 | length 35
  Top Layer w0.4: v2(46.355,35.306) 46.355,37.404 U15.35@46.46,37.509 ; R36.1@72.771,31.61 72.838,31.677 73.587,31.677 74.418,32.508 74.418,33.497 U7.4@74.422,33.501 v2(74.422,35.052)
  Bottom Layer w0.4: v2(46.355,35.306) 74.114,35.306 74.368,35.052 v2(74.422,35.052)
RX_N: R18.1 U4.5 | length 4.2
  Top Layer w0.295: U4.5@16.846,63.253 16.846,65.601 17.858,66.613 17.858,66.639 18.136,66.916 R18.1@18.161,66.916
RX_P: R22.1 U4.6 | length 4.2
  Top Layer w0.295: R22.1@16.002,67.056 16.002,66.687 R22.1@16.051,66.639 ; R22.1@16.129,66.916 16.346,66.699 U4.6@16.346,63.253
TX1_RS485: U11.2 U15.33 | length 22.3
  Top Layer w0.4: U15.33@43.942,37.054 43.942,34.598 44.196,34.344 v2(44.196,34.29) ; v2(61.468,32.766) 61.506,32.804 61.889,32.804 62.23,33.145 U11.2@62.23,33.705
  Bottom Layer w0.4: v2(44.196,34.29) 45.72,32.766 v2(61.468,32.766)
TX2_RS485: U12.2 U15.38 | length 30.9
  Top Layer w0.4: U15.38@50.133,37.064 50.133,36.735 51.054,35.814 77.47,35.814 78.763,34.521 U12.2@78.763,33.501
TX_N: R23.1 U4.1 | length 5.5
  Top Layer w0.295: U4.1@18.846,63.253 18.846,63.931 21.759,66.844 22.407,66.844 R23.1@22.479,66.916
TX_P: R24.1 U4.2 | length 4.5
  Top Layer w0.295: U4.2@18.346,63.253 18.346,64.32 20.247,66.221 20.247,66.843 R24.1@20.32,66.916
VBAT: C39.2 C40.2 TP4.1 U14.14 VBAT1.P | length 41.1
  Top Layer w0.6: U14.14@69.259,42.799 v2(70.866,42.799)
  Bottom Layer w0.6: C39.2@72.898,43.929 72.825,43.856 71.923,43.856 v2(70.866,42.799) 70.866,40.259 73.025,38.1 v2(81.28,38.1) ; C39.2@72.898,43.942 74.93,43.942 81.153,43.942 90.244,53.033 90.376,53.033 91.376,54.033 VBAT1.P@91.376,54.483
VBUS: C50.2 C51.2 D5.1 D6.5 USB1.A4 USB1.B4 | length 31.8
  Top Layer w0.254: D6.5@14.331,21.209 v2(15.748,21.209)
  Top Layer w0.3: USB1.B4@8.156,18.888 USB1.B4@8.255,18.789
  Top Layer w0.35: USB1.B4@8.156,18.888 7.274,18.888 6.113,20.049 6.113,22.423 7.2,23.509 8.09,23.509 USB1.A4@8.191,23.611
  Top Layer w0.55: USB1.A4@8.191,23.611 9.768,23.611 v2(11.049,24.892)
  Top Layer w0.6: D5.1@3.429,30.988 3.43,30.986 3.43,29.59 4.064,28.956 C51.2@11.036,28.956 ; C50.2@11.036,26.289 C50.2@11.049,26.276 ; v2(11.049,24.892) C50.2@11.049,26.276 ; C51.2@11.049,28.756 C50.2@11.049,26.276
  Bottom Layer w0.4: v2(11.049,24.892) 12.119,24.892 15.648,21.363 15.748,21.263 v2(15.748,21.209)
VIN: DC1.1 SW1.2 | length 26.1
  Top Layer w1: DC1.1@82.338,79.756 82.529,79.565 82.529,77.618 84.023,76.124 94.029,76.124 94.615,75.538 94.615,67.767 93.86,67.012 92.133,67.012 SW1.2@91.846,66.725
Vo: LCD1.3 VR1.2 | length 3
  Top Layer w0.6: VR1.2@78.841,92.583 78.841,90.572 79.502,89.911 LCD1.3@79.502,89.812
XI: C29.2 R29.1 U4.30 X1.3 | length 15.7
  Top Layer w0.28: 13.145,43.149 X1.3@14.856,43.149 ; X1.3@14.874,43.131 15.284,43.541 15.711,43.541 15.875,43.705 15.875,46.621 15.435,47.061 15.385,47.061 15.175,47.271 R29.1@15.175,47.321
  Top Layer w0.295: C29.2@12.192,43.294 12.337,43.149 13.145,43.149 ; R29.1@15.1,47.371 15.1,47.396 15.378,47.674 15.403,47.674 15.846,48.117 U4.30@15.846,54.893
XO: C28.2 R29.2 U4.31 X1.1 | length 13
  Top Layer w0.295: U4.31@16.346,54.893 16.346,47.846 16.372,47.82 16.372,47.649 R29.2@16.65,47.371 ; R29.2@16.675,47.371 16.675,45.333 17.078,44.931 X1.1@17.174,44.931 ; X1.1@17.287,45.325 19.077,45.325 19.332,45.07 19.332,45.044 19.66,44.717 C28.2@19.685,44.717
pads on no net: COM1. COM1.7 EN1.SH1 EN1.SH2 LCD1.7 LCD1.8 LCD1.9 LCD1.10 MH1.1 MH3.1 MH4.1 SW1.3 U1.2 U1.3 U4.7 U4.12 U4.13 U4.18 U4.23 U4.24 U4.26 U4.38 U4.39 U4.40 U4.41 U4.42 U4.46 U4.47 U14.1 U14.3 U14.4 U14.5 U14.6 U14.7 U14.8 U14.9 U14.10 U14.11 U14.12 U15.41_5 U15.41_10 U15.41_11 U15.41_12 U15.41_13 U15.41_14 U15.41_15 U15.41_16 U15.41_17 U15.41_18 U15.41_19 U15.41_20 U15.41_21 U16.7 U16.8 U16.9 U16.10 U16.11 U16.12 U16.15 USB1.A8 USB1.B8

## Polygon pours and split planes (outlines as drawn)
GND on Top Layer "GND_L01_P000" (solid, remove dead copper, pour order 0): 54.102,0 0.889,0 0,0.889 0,93.98 1.27,95.25 94.615,95.25 95.885,93.98 95.885,30.196 55.81,30.257 53.975,28.423 53.975,0.127
GND_RS485 on Top Layer "GND_RS485_L01_P003" (solid, remove dead copper, pour order 3): 55.245,0 55.245,27.572 57.705,30.032 95.818,30.032 95.885,30.099 95.885,0
GND on Bottom Layer "GND_L02_P001" (solid, remove dead copper, pour order 1): 53.901,0.462 53.901,28.037 55.328,29.464 95.825,29.464 95.825,94.294 94.869,95.25 0.762,95.25 0,94.488 0,0.381 0.254,0.127
GND_RS485 on Bottom Layer "GND_RS485_L02_P002" (solid, remove dead copper, pour order 2): 55.245,0 55.245,27.686 57.658,30.099 95.885,30.099 95.885,0

## Keep-outs
Top Layer:
  lines w1: 54.61,0.381 54.61,26.416 56.896,28.702 86.741,28.702 88.9,28.702 89.027,28.575 92.202,25.4 95.631,25.4
Bottom Layer:
  lines w1: 54.61,0.508 54.61,26.416 56.896,28.702 88.773,28.702 92.075,25.4 95.504,25.4
Keep-Out Layer:
  the board outline again, w0.5

## Other copper
Top Layer:
  region net A2: 73.66,15.875 73.66,10.541 75.311,8.89 76.581,8.89 77.343,9.652 77.343,11.176 76.581,11.938 75.565,11.938 75.311,12.192 75.311,15.875
  region net NetD4_1: 79.383,12.446 79.383,16.098 79.599,16.314 80.518,16.314 80.518,17.487 80.01,17.487 79.629,17.868 79.629,19.646 79.292,19.983 78.994,19.685 78.994,17.78 78.437,17.223 77.784,17.223 77.784,12.446
  region net VIN: 83.439,81.788 83.439,78.994 85.344,77.089 94.056,77.089 95.631,75.514 95.631,67.183 93.853,65.405 90.551,65.405 89.789,66.167 89.789,67.437 90.424,68.072 92.812,68.072 94.132,69.393 94.132,73.127 92.024,75.235 81.991,75.235 81.026,76.2 81.026,81.788
  region net +5V_RS485: 82.561,19.812 83.488,20.74 85.915,20.74 85.915,18.109 82.094,18.109 81.733,18.47 81.733,19.607 81.938,19.812
  region net NetD1_2: 59.817,70.409 64.465,70.409 67.056,67.818 70.612,67.818 71.427,67.003 71.427,61.468 68.859,61.468 68.859,63.678 69.875,63.678 70.256,64.059 70.256,67.107 59.817,67.107
  region net +5V: 69.641,68.408 67.945,70.104 67.945,73.33 67.132,73.33 65.532,74.93 54.102,74.93 54.102,71.327 64.832,71.327 67.751,68.408
  region net +VCC: 83.591,63.424 87.401,63.424 87.401,67.742 83.896,67.742 80.061,71.577 80.061,74.346 78.232,74.346 78.232,70.993 83.591,65.634
  region net B1: 69.342,15.875 69.342,10.541 67.691,8.89 66.421,8.89 65.659,9.652 65.659,11.176 66.421,11.938 67.437,11.938 67.691,12.192 67.691,15.875
  region net A1: 56.896,15.875 58.928,15.875 58.928,12.065 59.69,11.303 60.706,11.303 61.341,11.938 62.611,11.938 63.373,11.176 63.373,9.652 62.611,8.89 61.341,8.89 60.579,9.652 58.797,9.652 56.896,11.61
  region net NetD3_2: 65.15,12.7 65.15,15.112 66.548,16.51 67.945,16.51 67.945,17.526 65.278,17.526 65.278,16.383 64.731,15.836 63.745,15.836 63.745,12.7
  region net +5V_RS485: 70.485,21.336 70.485,18.134 65.63,18.134 65.278,18.486 65.278,19.939 65.532,20.193 66.294,20.193 67.437,21.336
  region net NetD4_2: 80.814,19.643 80.925,19.532 80.925,18.605 82.042,17.487 84.328,17.487 84.328,16.598 82.677,16.598 82.55,16.471 82.55,16.217 81.661,15.328 81.661,12.7 80.137,12.7 80.137,15.836 81.28,15.836 81.788,16.344 81.788,17.345 81.163,17.97 80.906,18.227 80.325,18.227 80.186,18.366 80.186,19.416 80.412,19.643
  region net B2: 85.897,15.875 84.074,15.875 84.074,12.065 83.312,11.303 82.296,11.303 81.661,11.938 80.391,11.938 79.629,11.176 79.629,9.652 80.391,8.89 81.661,8.89 82.423,9.652 84.205,9.652 85.897,11.395
  region net +3.3V: 69.596,66.548 69.596,65.852 66.36,65.852 64.643,64.135 64.643,61.849 57.277,61.849 56.896,61.468 54.204,61.468 54.204,65.024 58.674,65.024 60.198,66.548
  region net +VCC: 72.771,77.265 74.979,77.265 75.311,77.597 75.311,79.375 79.502,79.375 80.01,78.867 80.01,70.485 78.672,70.485 78.672,77.429 78.378,77.724 76.708,77.724 76.327,77.343 76.327,76.2 75.311,76.2 74.858,76.653 72.771,76.653
  region net NetC5_2: 65.303,77.216 65.303,80.924 66.294,81.915 67.666,81.915 68.097,82.347 71.704,82.347 72.288,81.763 72.288,79.807 72.796,79.299 72.796,77.819 74.731,77.819 74.731,82.241 73.228,83.744 65.964,83.744 62.789,80.569 60.731,80.569 60.731,77.216
  region net NetC5_2: 74.447,77.902 74.574,78.029 74.574,81.585 72.288,81.585 72.288,80.061 72.542,80.061 72.923,79.68 72.923,77.902
  region net NetFuse1_1: 83.693,72.644 93.091,72.644 93.726,72.009 93.726,70.866 93.091,70.231 83.693,70.231

## Silkscreen, mask and mechanical layers (free items; w line width, h text height)
Top Overlay:
  text "LAN PORT" at 1.544,86.873 h3 r270
  text "PHY MODE" at 45.633,86.486 h2
  text "12 - 24 VDC" at 71.31,85.741 h2.3
  text "5V PWR" at 53.912,84.367 h2
  text "5V" at 62.611,83.566 h2
  text "1" at 27.824,83.455 h2.4 r90
  text "0" at 42.556,83.328 h2.4 r90
  text "ETHERNET RESET" at 26.559,82.738 h2 r270
  text "Bits  2  1  0" at 44.947,78.127 h2.4 r90
  text "3V3" at 32.512,77.615 h1.5
  text "GPIOs EXTENSION" at 36.342,76.873 h2 r270
  text "5V" at 32.512,75.075 h1.5
  text "IO45" at 32.512,72.535 h1.5
  text "MCU PWR" at 44.332,70.194 h2 r270
  text "IO48" at 32.512,69.995 h1.5
  text "IO8" at 32.512,67.328 h1.5
  text "IO19" at 32.512,64.915 h1.5
  text "IO20" at 32.512,62.375 h1.5
  text "IO3" at 32.512,59.835 h1.5
  text "VCC PWR" at 76.399,58.182 h2
  text "VCC" at 86.146,58.078 h2
  text "IO46" at 32.385,57.295 h1.5
  text "3.3V" at 64.979,54.903 h2
  text "IO9" at 32.385,54.501 h1.5
  text "EEP PWR" at 80.344,52.363 h2
  text "3V3 PWR" at 56.968,52.34 h2
  text "GND" at 87.665,50.133 h2.3
  text "RTC PWR" at 88.558,49.331 h2 r270
  text "3V3 RJ45" at 0.958,46.918 h2 r270
  text "3V3 PWR" at 6.546,46.41 h2 r270
  text "VBAT" at 73.804,36.615 h2
  text "GND" at 0.943,33.073 h2
  text "DEBUG PWR" at 13.208,32.893 h2
  text "GND RS485" at 52.794,27.598 h2 r270
  text "5V RS485" at 90.521,15.565 h1.5 r270
  text "GND RS485" at 93.382,15.557 h1.5 r270
  text "3V3 DEBUG" at 0.762,14.097 h2.2
  text "TYPE-C" at 0.818,11.8 h2
  text "MODBUS RTU" at 63.628,5.35 h2.5
  text "PORT 2" at 74.24,2.556 h2.5
  text "PORT 1" at 59.889,2.429 h2.5
  text "RESET" at 7.53,1.032 h2.5
  text "BOOT" at 16.039,1.032 h2.5
Bottom Overlay:
  text "LCD 16x4A" at 82.851,85.995 h2
  text "ESP32 - GATEWAY" at 31.381,24.91 h2.5
  text "VERSION 1.0.0" at 31.508,22.37 h2.5
  text "DESIGNED BY XUAN PHAT" at 31.623,19.715 h2.5
  text "B1-" at 68.521,13.374 h2.5
  text "A1+" at 63.5,13.335 h2.5
  text "A2+" at 77.597,13.208 h2.5
  text "B2-" at 82.931,13.208 h2.5